# Altium PCB MCED_pcb_1.PcbDoc
Units mm, origin at the board's own origin, x right, y up, seen from the top; angles counter-clockwise.
Board outline 44 x 49 mm, 2 copper layers (L1, L2), stack 1.671 mm thick; 33 components, 23 nets, 111 pads, 5 vias.
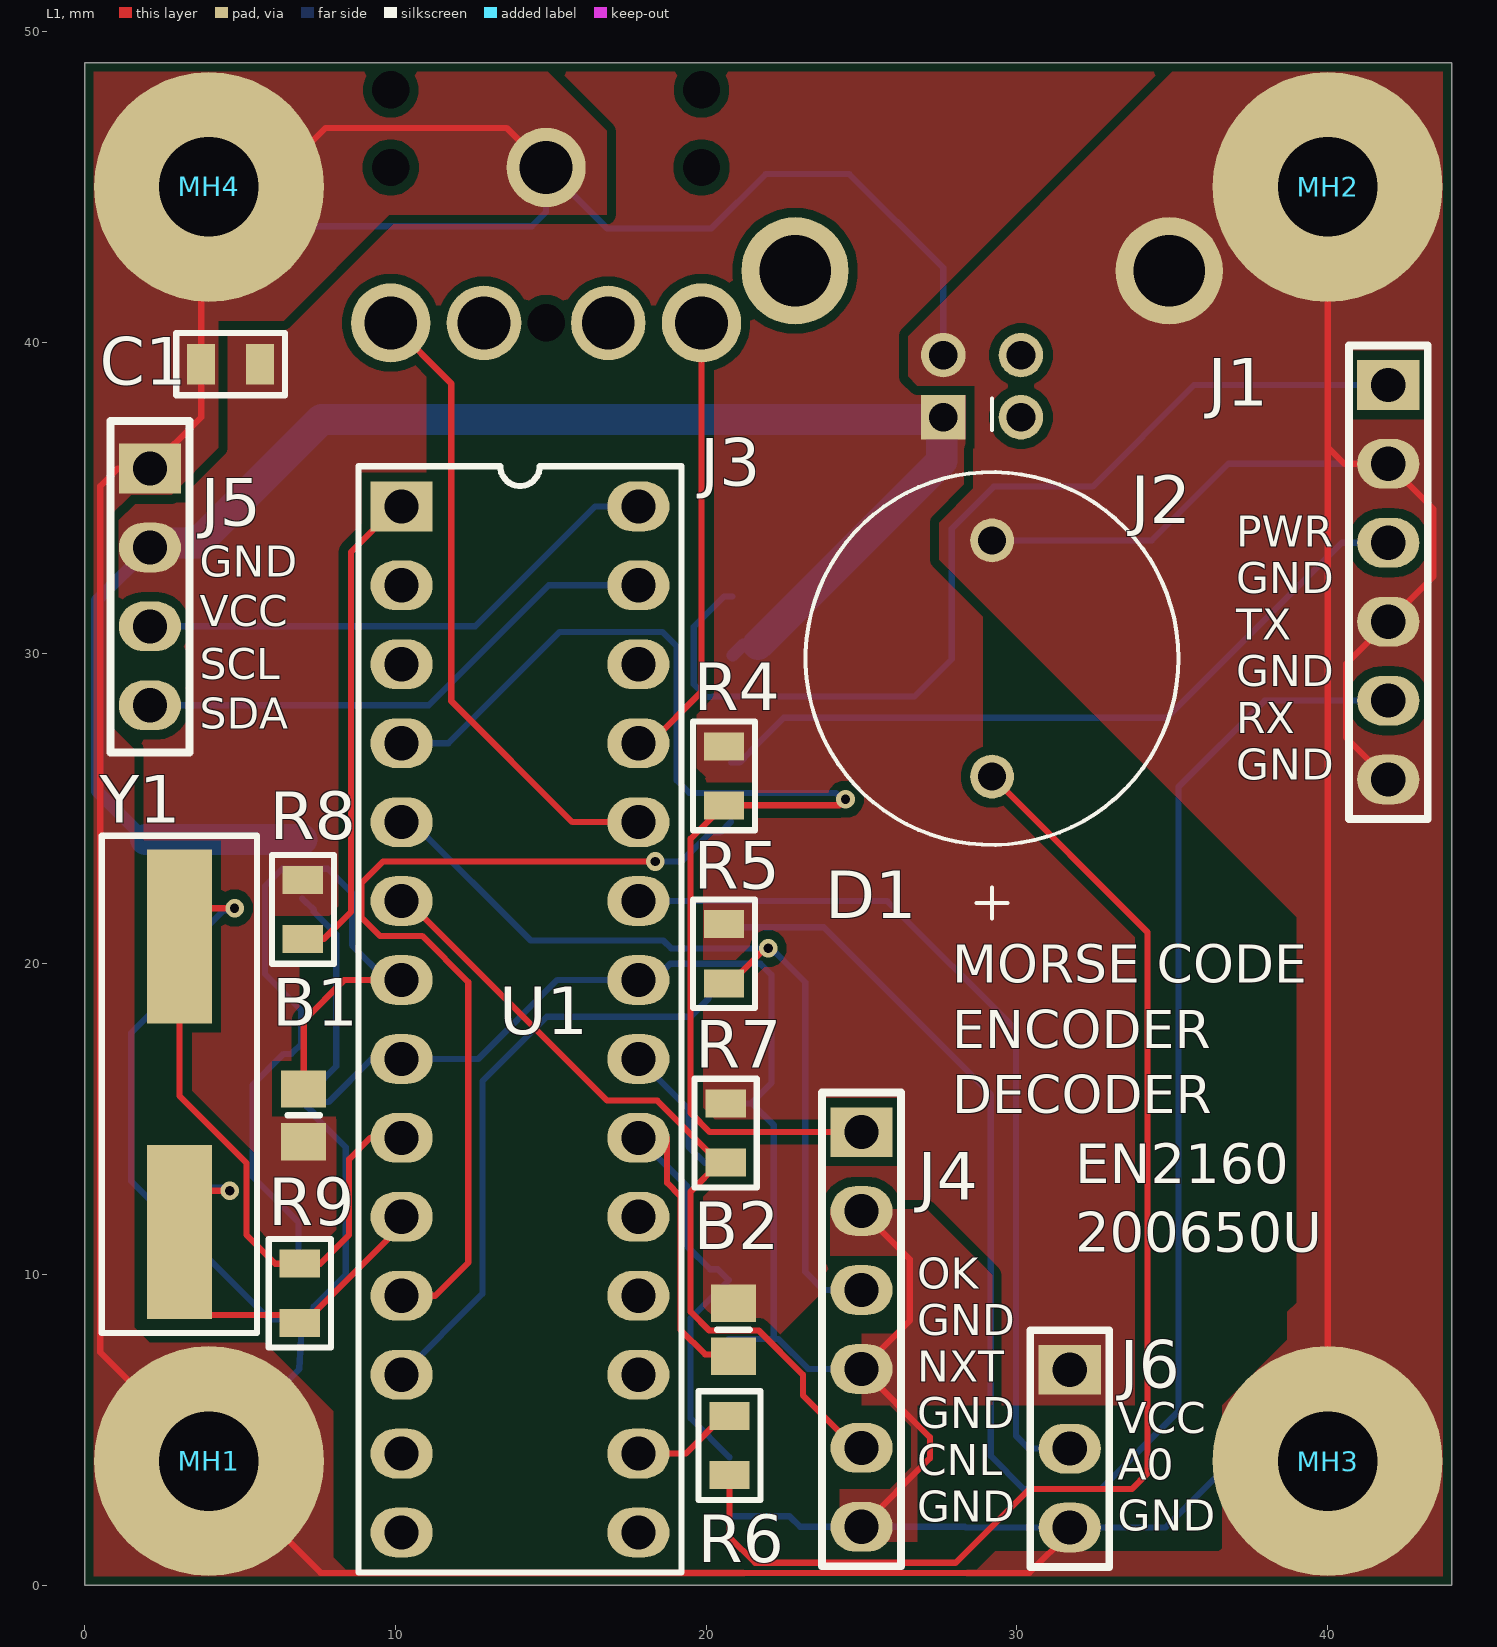
[diagram p0: L1 view]
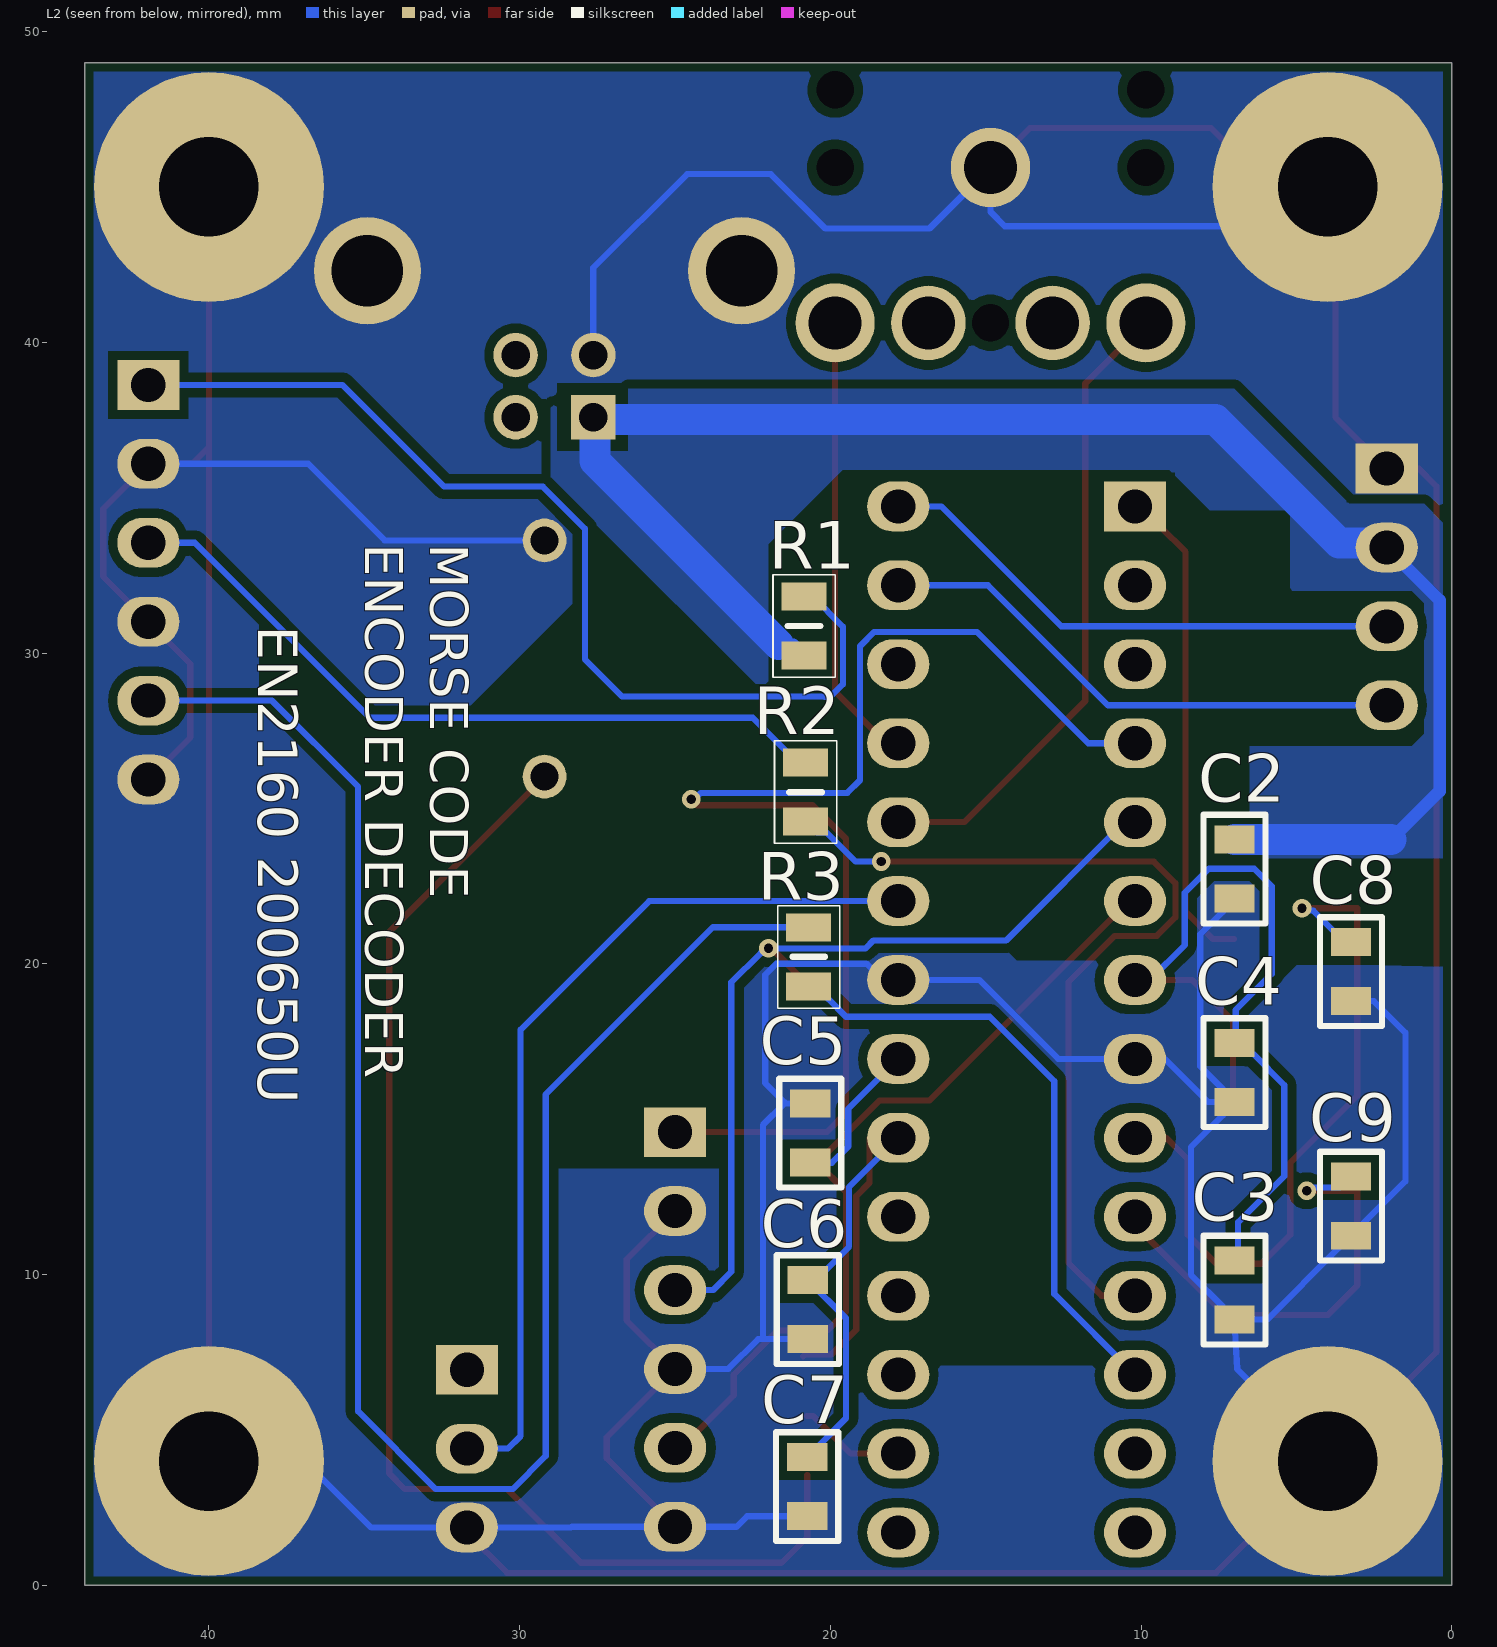
[diagram p1: L2 view, seen from below]
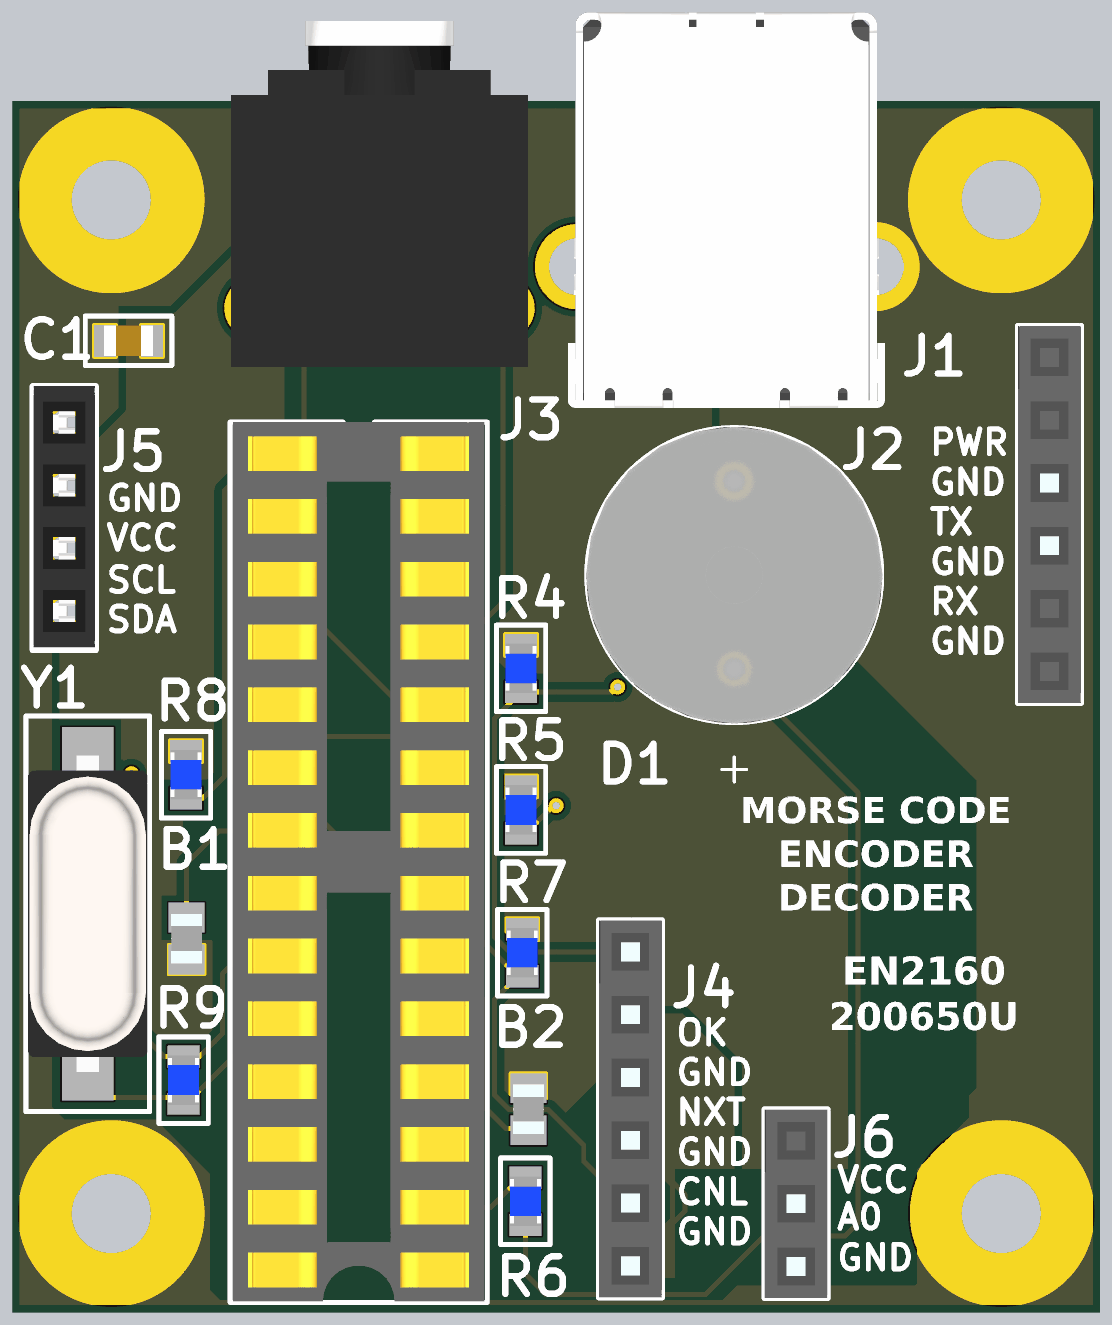
[diagram p2: 3D render of the assembled board from above, using the file's embedded part models]
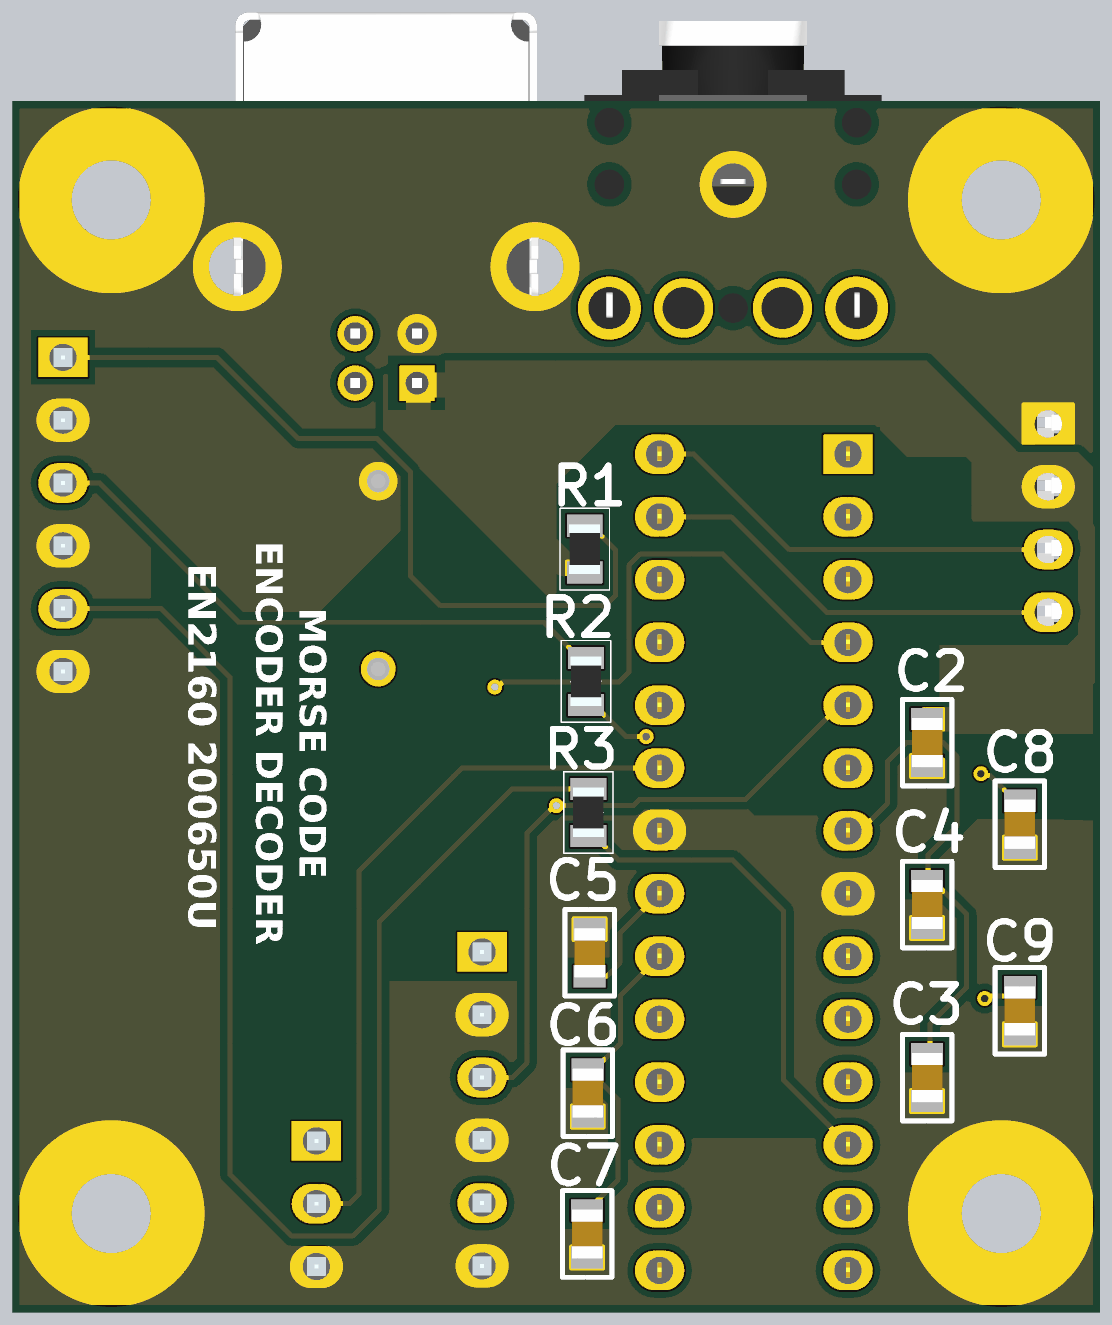
[diagram p3: 3D render of the assembled board from below, using the file's embedded part models]

## Layer stack, top to bottom
Top Solder: solder mask 0.0102, Solder Resist, Dk 3.5
L1: signal copper 0.0356
Dielectric 1: dielectric 1.6, FR-4, Dk 4.8
L2: signal copper 0.0356
Bottom Solder: solder mask 0.0102, Solder Resist, Dk 3.5

## Board outline
0,0 44,0 44,49 0,49

## Design rules (kind name [scope] priority, off if disabled: settings)
BoardOutlineClearance [All] p1: gap=0.2 ignorepadtopadclearanceinfootprint=FALSE
Clearance "Around Polygons" [IsRegion] p1: gap=0.3 ignorepadtopadclearanceinfootprint=FALSE
Clearance [All] p2: gap=0.127 ignorepadtopadclearanceinfootprint=FALSE except(0.25: Arc-Hole Track-Hole SMDPad-Hole THPad-Hole Via-Hole Fill-Hole Poly-Hole Region-Hole Text-Hole)
ComponentClearance [All] p1: gap=0.127 collisioncheckmode=3 verticalgap=0.127 showdistances=TRUE
DiffPairsRouting [All] p1: maxlimit=0.254 minlimit=0.127 mostfreqgap=0.127 toplayer_minwidth=0.127 toplayer_maxwidth=25.4 toplayer_prefwidth=0.127 bottomlayer_minwidth=0.127 bottomlayer_maxwidth=25.4 bottomlayer_prefwidth=0.127 maxuncoupledlength=12.7
Height [All] p1: minheight=0 maxheight=1816.048 prefheight=12.7
HoleSize [All] p1: absolutevalues=TRUE maxlimit=6.3 minlimit=0.3 maxpercent=80.000 minpercent=20.000
HoleToHoleClearance [All] p1: gap=0.25 allowstackedmicrovias=FALSE
MinimumAnnularRing [All] p1: minimumring=0.076
MinimumSolderMaskSliver [All] p1: minsoldermaskwidth=0
PlaneClearance [All] p1: clearance=1
PlaneConnect PlaneConnectPowerPads [InPadClass('PowerPads')] p1: planeconnectstyle=Direct reliefexpansion=0.508 reliefentries=4 reliefconductorwidth=0.254 reliefairgap=0.254
PlaneConnect [All] p2: pad.planeconnectstyle=Relief pad.reliefexpansion=0.3 pad.reliefentries=4 pad.reliefconductorwidth=0.127 pad.reliefairgap=0.127 via.planeconnectstyle=Direct via.reliefexpansion=0.3 via.reliefentries=4 via.reliefconductorwidth=0.127 via.reliefairgap=0.127
PolygonConnect PolygonConnectPowerPads [All vs (InPadClass('PowerPads'))] p1: connectstyle=Direct reliefconductorwidth=0.254 reliefentries=4 polygonreliefangle="90 Angle" airgapwidth=0.254
PolygonConnect [All] p2: connectstyle=Direct reliefconductorwidth=0.127 reliefentries=4 polygonreliefangle="90 Angle" airgapwidth=0.127
RoutingVias [All] p1: holewidth=0.3 width=0.6 viastyle="Through Hole" minholewidth=0.3 minwidth=0.6 maxholewidth=0.6 maxwidth=6.6
SilkToSilkClearance [All] p1: silktosilkclearance=0
SilkToSolderMaskClearance [IsPad] p1: minsilkscreentomaskgap=0.127 clearancetoexposedcopper=TRUE
SolderMaskExpansion [All] p1: expansion=0.075 istentingtop=FALSE
Width [All] p1: maxlimit=25.4 minlimit=0.127 preferedwidth=0.2 minimp=50.000000 maximp=50.000000 favimp=50.000000
20 further rules are at their usual default settings.

## Components (designator, comment, footprint, x,y, rotation, side; value= is the part's Value field where it differs from the comment)
B1 "Ferrite Bead" "FERRITE BEAD C2012X105N" 7.05,15.125 r90 top
B2 "Ferrite Bead" "FERRITE BEAD C2012X105N" 20.875,8.225 r90 top
C1 "10 uF" C0805 4.7,39.3 r0 top
C2 "22pF" C0805 7,23.05 r90 bottom
C3 "10 uF" C0805 7,9.5 r90 bottom
C4 "22pF" C0805 7,16.5 r90 bottom
C5 "100 nF" C0805 20.65,14.55 r270 bottom
C6 "22pF" C0805 20.725,8.875 r90 bottom
C7 "10 uF" C0805 20.75,3.175 r90 bottom
C8 "22pF" C0805 3.25,19.75 r270 bottom
C9 "22pF" C0805 3.25,12.2 r270 bottom
D1 "Buzzer" BUZZER 29.2,29.825 r90 top
J1 "LED - 6 Pin Header" "6 PIN HEADER" 41.95,38.63 r0 top
J2 "USB connector" "USB 2.0 TYPE B 617291011BLF" 27.63,37.59 r180 top
J3 "3.5 mm Audio Jack" "AUDIO JACK SJ13523N" 14.85,50.125 r270 top
J4 "PB - 6 Pin Header" "6 PIN HEADER" 25,14.585 r0 top
J5 "4 Pin Header, 1 Row, Female, 2.54mm Pitch" "4 PIN HEADER" 2.1,35.94 r0 top
J6 "POT - 3 Pin Header" "3 PIN HEADER" 31.7,6.94 r0 top
MH1 "MH" "MOUNTING HOLE" 4,4 r0 top
MH2 "MH" "MOUNTING HOLE" 40,45 r0 top
MH3 "MH" "MOUNTING HOLE" 40,4 r0 top
MH4 "MH" "MOUNTING HOLE" 4,45 r0 top
R1 "330ohm" "300OHM RESC2012X60N" 20.85,30.875 r90 bottom value=330R
R2 "330ohm" "300OHM RESC2012X60N" 20.8,25.525 r90 bottom value=330R
R3 "330ohm" "300OHM RESC2012X60N" 20.7,20.225 r90 bottom value=330R
R4 "10 kOhm" 10K 20.575,26.05 r90 top value=10kR
R5 "10 kOhm" 10K 20.575,20.325 r90 top value=10kR
R6 "10 kOhm" 10K 20.75,4.5 r90 top value=10kR
R7 "10 kOhm" 10K 20.625,14.55 r90 top value=10kR
R8 "10 kOhm" 10K 7.025,21.75 r90 top value=10kR
R9 "10 kOhm" 10K 6.925,9.4 r90 top value=10kR
U1 "TH_IC SOCKET" 28DIP_THROUGH_HOLE_IC_SOCKET 10.2,34.72 r0 top
Y1 "ABLS-16.000MHZ-B4-T" ABLS-16.000MHZ-B4-T_CRYSTAL 3.05,16.125 r90 top

## Footprints (in the part's own frame and the unit in brackets; to place one, negate y for a bottom-side part, rotate by r counter-clockwise, add the part's x,y. Pads: shape width x height; smd on the part's side, far side on the other; paste and mask are expansions set on the pad)
"3 PIN HEADER" [mm]
  rect 2x1.6 hole 1.1: 1(0,0)
  oval 2x1.6 hole 1.1: 2(0,-2.54) 3(0,-5.08)
  silkscreen extent -1.27,-6.35 1.27,1.27, body extent -1.27,-6.35 1.27,1.27, height 8.26
"4 PIN HEADER" [mm]
  rect 2x1.6 hole 1.1: 1(0,0)
  oval 2x1.6 hole 1.1: 2(0,-2.54) 3(0,-5.08) 4(0,-7.62)
  silkscreen extent -1.27,-9.14 1.27,1.52, body extent -1.25,-9.04 1.25,1.52, height 8.51
"6 PIN HEADER" [mm]
  rect 2x1.6 hole 1.1: 1(0,0)
  oval 2x1.6 hole 1.1: 2(0,-2.54) 3(0,-5.08) 4(0,-7.62) 5(0,-10.16) 6(0,-12.7)
  silkscreen extent -1.27,-13.97 1.27,1.27, body extent -1.27,-13.97 1.27,1.27, height 8.26
10K [mm] "Resistor"
  rect 0.9x1.3 smd: 1(-0.95,0) 2(0.95,0)
  silkscreen extent -1.75,-1 1.75,1, body extent -1,-0.63 1,0.63, height 0.45
28DIP_THROUGH_HOLE_IC_SOCKET [mm]
  rect 2x1.6 hole 1.1: 1(0,0)
  oval 2x1.6 hole 1.1: 2(0,-2.54) 3(0,-5.08) 4(0,-7.62) 5(0,-10.16) 6(0,-12.7) 7(0,-15.24) 8(0,-17.78) 9(0,-20.32) 10(0,-22.86) 11(0,-25.4) 12(0,-27.94) 13(0,-30.48) 14(0,-33.02) 15(7.62,-33.02) 16(7.62,-30.48) 17(7.62,-27.94) 18(7.62,-25.4) 19(7.62,-22.86) 20(7.62,-20.32) 21(7.62,-17.78) 22(7.62,-15.24) 23(7.62,-12.7) 24(7.62,-10.16) 25(7.62,-7.62) 26(7.62,-5.08) 27(7.62,-2.54) 28(7.62,0)
  silkscreen extent -1.39,-34.31 9.01,1.29, body extent -1.27,-34.27 8.89,1.29, height 5.15
"300OHM RESC2012X60N" [mm] "330 Ohm"
  rect 0.9x1.45 smd: 1(-0.95,0) 2(0.95,0)
  silkscreen extent -1.65,-1 1.65,1, body extent -1,-0.63 1,0.63, height 0.6
ABLS-16.000MHZ-B4-T_CRYSTAL [mm]
  rect 5.6x2.1 smd: 1(-4.75,0) 2(4.75,0)
  silkscreen extent -8,-2.5 8,2.5, body extent -6.4,-2.41 6.4,2.41, height 4.31
"AUDIO JACK SJ13523N" [mm] "audio jack"
  round 2.55 hole 1.7: 1(4.5,0) 2(9.5,-5) 3(9.5,5)
  round 2.4 hole 1.7: 10(9.5,-2) 11(9.5,2)
  round 0.6 hole 1.2 unplated: MH1(2,5) MH2(4.5,5) MH3(9.5,0) MH4(2,-5) MH5(4.5,-5)
  body extent -10,-3.38 10,3.38, height 5.8
BUZZER [mm] "Buzzer"
  round 1.408 hole 0.9: N(3.8,0) P(-3.8,0)
  silkscreen extent -8.36,-6 8.36,6, body extent -5.99,-6 5.99,6, height 9.51
C0805 [mm]
  rect 0.9x1.3 smd: 1(-0.95,0) 2(0.95,0)
  silkscreen extent -1.75,-1 1.75,1, body extent -1,-0.63 1,0.63, height 1
"FERRITE BEAD C2012X105N" [mm] "FERRITE BEAD"
  rect 1.2x1.45 smd: 1(-0.85,0) 2(0.85,0)
  silkscreen extent 0,-0.53 0,0.52, body extent -10,-3.38 10,3.38, height 5.8
"MOUNTING HOLE" [mm]
  round 7.4 hole 3.2: 1(0,0)
"USB 2.0 TYPE B 617291011BLF" [mm]
  rect 1.431x1.431 hole 0.92: 1(0,0)
  round 1.431 hole 0.92: 2(-2.5,0) 3(-2.5,-2) 4(0,-2)
  round 3.45 hole 2.3: MH1(4.77,-4.71) MH2(-7.27,-4.71)
  body extent -7.66,-15 5.16,1, height 11.11

## Part data
B1 B2: library part MPZ2012S601AT000, "Ferrite Bead, 1 Function(s), 2A", Case Code=0805, Clock Frequency=100MHz, Current Rating=2A, DC Resistance-Max=100mR, Manufacturer=TDK, Max Operating Temperature=125°C, Min Operating Temperature=-55°C, Supplier Part Number=810-MPZ2012S601AT000, Category="Ferrite Beads and Chips", Channels=1, ComponentLink1Description=https://datasheet.ciiva.com:443/pdfs/VipMasterIC/IC/TDKC/TDKC-S-A0008032886/TDKC-S-A0008032886-1.pdf?src-supplier=IHS+Markit, ComponentLink1URL=https://datasheet.ciiva.com:443/pdfs/VipMasterIC/IC/TDKC/TDKC-S-A0008032886/TDKC-S-A0008032886-1.pdf?src-supplier=IHS+Markit, ComponentLink2Description=https://datasheet.ciiva.com/46634/beads-commercial-power-mpz-en-46634335.pdf?src-supplier=Digi-Key, ComponentLink2URL=https://datasheet.ciiva.com/46634/beads-commercial-power-mpz-en-46634335.pdf?src-supplier=Digi-Key, ComponentLink3Description=https://datasheet.ciiva.com/46634/beads-commercial-power-mpz-en-46634377.pdf?src-supplier=Digi-Key, ComponentLink3URL=https://datasheet.ciiva.com/46634/beads-commercial-power-mpz-en-46634377.pdf?src-supplier=Digi-Key, ComponentLink4Description=https://datasheet.ciiva.com/46634/beads-commercial-power-mpz-en-46634606.pdf?src-supplier=Digi-Key, ComponentLink4URL=https://datasheet.ciiva.com/46634/beads-commercial-power-mpz-en-46634606.pdf?src-supplier=Digi-Key, Construction="Chip Bead", Filter Type="FERRITE CHIP", Height=0.85mm, JESD-609 Code=e2, Length=2mm, Manufacturer Part Number=MPZ2012S601AT000, Material=Ferrite, Min Frequency=100MHz, Mounting Technology="Surface Mount", Output Impedance=600R, Packaging="Tape and Reel", Pricing="1=0.12, 10=0.061, 50=0.061, 100=0.042, 1000=0.035, 10000=0.027 (USD)", Reach SVHC Compliant=Yes, RoHS=Yes, RoHS Compliant=Yes, Stock=782263, Supplier=Mouser, Terminal Finish=Copper, Width=1.25mm
C1 C3 C5 C7: library part CL21A106KBYQNNE, "10 uF Ceramic Capacitor, Multilayer, Ceramic, 50V, 10% +Tol, 10% -Tol, X5R, 15% TC, 10uF, Surface Mount, 0805", Capacitor Type=Ceramic, Manufacturer=Samsung, Supplier Part Number=187-CL21A106KBYQNNE, Category="Ceramic Capacitors", ComponentLink1Description=https://datasheet.ciiva.com:443/pdfs/VipMasterIC/IC/SEMS/SEMS-S-A0008524728/SEMS-S-A0008519922-1.pdf?src-supplier=IHS+Markit, ComponentLink1URL=https://datasheet.ciiva.com:443/pdfs/VipMasterIC/IC/SEMS/SEMS-S-A0008524728/SEMS-S-A0008519922-1.pdf?src-supplier=IHS+Markit, Dielectric Material=Ceramic, Manufacturer Part Number=CL21A106KBYQNNE, Pins=2, Pricing="1=0.42, 10=0.299, 50=0.299, 100=0.197, 1000=0.124, 10000=0.1 (USD)", Reach SVHC Compliant=Yes, RoHS=Yes, RoHS Compliant=Yes, Stock=29602, Supplier=Mouser
C2 C4 C6 C8 C9: library part VJ0805A220GXACW1BC, "22pF Ceramic Capacitor, Multilayer, Ceramic, 50V, 2% +Tol, 2% -Tol, C0G, -/+30ppm/Cel TC, 0.000022uF, Surface Mount, 0805", Capacitor Type=Ceramic, Case/Package=0805, Manufacturer="Vishay Vitramon", Manufacturer Series=VJ, Max Operating Temperature=125°C, Min Operating Temperature=-55°C, Package Shape=Rectangular, Rated DC Voltage (URdc)=50V, Supplier Part Number=C2174318, Temperature Characteristics Code=C0G, Tolerance  (fill in as +-)=2%, Category="Ceramic Capacitors", ComponentLink1Description=https://datasheet.ciiva.com:443/pdfs/VipMasterIC/IC/BEYS/BEYSS01615/BEYSS01615-1.pdf?src-supplier=IHS+Markit, ComponentLink1URL=https://datasheet.ciiva.com:443/pdfs/VipMasterIC/IC/BEYS/BEYSS01615/BEYSS01615-1.pdf?src-supplier=IHS+Markit, ComponentLink2Description=https://datasheet.ciiva.com/16511/vjw1bcbascomseries-16511287.pdf?src-supplier=Future+Electronics, ComponentLink2URL=https://datasheet.ciiva.com/16511/vjw1bcbascomseries-16511287.pdf?src-supplier=Future+Electronics, Dielectric Material=Ceramic, JESD-609 Code=e3, Manufacturer Part Number=VJ0805A220GXACW1BC, Mounting Technology="Surface Mount", Multilayer=Yes, Packaging="Tape and Reel", Pins=2, Pricing="5=0.0755, 50=0.0623, 150=0.0557, 500=0.0508, 2500=0.042, 4000=0.04 (USD)", Reach SVHC Compliant=Yes, RoHS=Yes, RoHS Compliant=Yes, Stock=3750, Supplier=LCSC, Terminal Finish=Tin, Termination=Wraparound, Tolerance (fill in as +-)=2%
D1: library part KXG1201C, "Buzzer - Magnetic Indicator Active Buzzer [Kingstate], Pine Type, Dimensions(mm): 12.00*9.50, Voltage:1.2~3.0, Max current consumption(mA): Max. 30, SPL(dB): Min. 80dB(Typical 85)@10cm, Frequency(KHz): 2.30.", Package=None, Availability="In Stock", Check_prices=https://www.snapeda.com/parts/KXG1201C/Kingstate/view-part/?ref=eda, MF=Kingstate, MP=KXG1201C, Price=None, SnapEDA_Link=https://www.snapeda.com/parts/KXG1201C/Kingstate/view-part/?ref=snap
J1 J4: library part 929850-01-06-RB, "6 Pin Header Board Connector", Manufacturer=3M, Manufacturer Series=929, Supplier Part Number=517-929850-01-06-RB, Category="Headers and Wire Housings", ComponentLink1Description=https://datasheet.ciiva.com:443/pdfs/VipMasterIC/IC/IIIM/IIIMS03618/IIIMS03618-1.pdf?src-supplier=IHS+Markit, ComponentLink1URL=https://datasheet.ciiva.com:443/pdfs/VipMasterIC/IC/IIIM/IIIMS03618/IIIMS03618-1.pdf?src-supplier=IHS+Markit, ComponentLink2Description=https://datasheet.ciiva.com/5148/ts0815-5148223.pdf?src-supplier=Mouser, ComponentLink2URL=https://datasheet.ciiva.com/5148/ts0815-5148223.pdf?src-supplier=Mouser, ComponentLink3Description=https://datasheet.ciiva.com/756/ts0815-756418.pdf?src-supplier=Digi-Key, ComponentLink3URL=https://datasheet.ciiva.com/756/ts0815-756418.pdf?src-supplier=Digi-Key, Connector Type="BOARD CONNECTOR", Manufacturer Part Number=929850-01-06-RB, Pricing="1=2.56, 10=2.08, 50=2.08, 100=1.99, 1000=1.42, 10000=1.26 (USD)", Reach SVHC Compliant=Yes, RoHS=Yes, RoHS Compliant=Yes, Stock=258, Supplier=Mouser
J2: library part 61729-1011BLF, "USB 2.0 connector, Type B, Receptacle, Through Hole, 30u GXT Contact, 4 Pins, 1.57mm PCB", Manufacturer="Amphenol ICC / FCI", Category=Connectors, ComponentLink1Description=https://datasheet.ciiva.com/8015/697864-8015261.pdf?src-supplier=Element14, ComponentLink1URL=https://datasheet.ciiva.com/8015/697864-8015261.pdf?src-supplier=Element14, Manufacturer Part Number=61729-1011BLF, RoHS=No, Supplier=Avnet, Supplier Part Number=61729-1011BLF
J3: library part SJ1-3523N, "3.5 mm Audio Jack, Female, 3 Pole(s), Solder Terminal, Jack", Manufacturer="CUI Devices", Supplier Part Number=490-SJ1-3523N, Category="Audio / Video Connectors", Manufacturer Part Number=SJ1-3523N, Pricing="1=1.08, 10=0.913, 50=0.913, 100=0.819, 1000=0.596, 10000=0.495 (USD)", Reach SVHC Compliant=Yes, RoHS=Yes, Stock=9497, Supplier=Mouser
J5: library part M20-7820446, "4 Pin Header Board Connector, 4 Contact(s), 1 Row(s), Female, Straight, 0.1 inch Pitch, Solder Terminal, Locking, Black Insulator, Socket", Contact Resistance=20mR, Dielectric Withstanding Voltage (AC)=1kV, Flammability Rating="UL94 V-0", Insulation Color=Black, Insulation Resistance=1GR, Manufacturer=Harwin, Max Operating Temperature=105°C, Min Operating Temperature=-40°C, Rated Current (Signal)=3A, Supplier Part Number=952-1792-ND, Body Breadth=0.098inch, Body Depth=0.335inch, Body Length=0.4inch, Body/Shell Style=SOCKET, Category="Headers and Wire Housings", ComponentLink1Description=https://datasheet.ciiva.com:443/pdfs/VipMasterIC/IC/HRWN/HRWN-S-A0004894635/HRWN-S-A0004894635-1.pdf?src-supplier=IHS+Markit, ComponentLink1URL=https://datasheet.ciiva.com:443/pdfs/VipMasterIC/IC/HRWN/HRWN-S-A0004894635/HRWN-S-A0004894635-1.pdf?src-supplier=IHS+Markit, ComponentLink2Description=https://datasheet.ciiva.com/11747/0900766b80dc1d2b-11747084.pdf?src-supplier=Rs, ComponentLink2URL=https://datasheet.ciiva.com/11747/0900766b80dc1d2b-11747084.pdf?src-supplier=Rs, ComponentLink3Description=https://datasheet.ciiva.com/6784/m20-782-6784360.pdf?src-supplier=Digi-Key, ComponentLink3URL=https://datasheet.ciiva.com/6784/m20-782-6784360.pdf?src-supplier=Digi-Key, ComponentLink4Description=https://datasheet.ciiva.com/7639/1836950-7639727.pdf?src-supplier=Element14, ComponentLink4URL=https://datasheet.ciiva.com/7639/1836950-7639727.pdf?src-supplier=Element14, ComponentLink5Description=https://datasheet.ciiva.com/10151/m20-782-10151359.pdf?src-supplier=Avnet, ComponentLink5URL=https://datasheet.ciiva.com/10151/m20-782-10151359.pdf?src-supplier=Avnet, Connector Type="BOARD CONNECTOR", Contact Finish - Mating=TIN, Contact Finish - Termination=TIN, Contact Gender=Female, Contact Pattern=RECTANGULAR, Contact Style="SQ PIN-SKT", DIN Conformance=No, Durability=300Cycles, Filter Feature=No, IEC Conformance=No, Insulation Material=Polyamide, JESD-609 Code=e3, Manufacturer Part Number=M20-7820446, Mating Contact Pitch=0.1inch, MIL Conformance=No, Mixed Contacts=No, Mounting Option 1=LOCKING, Mounting Style=STRAIGHT, Mounting Technology=Board, Number Of Connectors=1, Number of Contacts=4, Number Of PCB Rows=1, Number of Rows Loaded=1, Option="General Purpose", PCB Contact Pattern=RECTANGULAR, Polarization Key="POLARIZED HOUSING", Pricing="1=1.02, 10=0.859, 100=0.771, 500=0.63084, 1000=0.56075, 5000=0.49066, 10000=0.46613 (USD)", Reach SVHC Compliant=Yes, Reference Standard=UL, Reliability=COMMERCIAL, RoHS=Yes, RoHS Compliant=Yes, Stock=3461, Supplier=Digi-Key, Terminal Length=0.118inch, Terminal Pitch=2.54mm, Termination=Solder
J6: library part 929850-01-03-RA, "3 Pin Header Board Connector, 3 Contact(s), 1 Row(s), Female, Straight, Solder Terminal, Socket", Flammability Rating="UL94 V-0", Manufacturer=3M, Manufacturer Series=929, Supplier Part Number=19-929850-01-03-RA-ND, Additional Feature=3M, Body/Shell Style=SOCKET, Category="Headers and Wire Housings", ComponentLink1Description=https://datasheet.ciiva.com:443/pdfs/VipMasterIC/IC/IIIM/IIIMS03618/IIIMS03618-1.pdf?src-supplier=IHS+Markit, ComponentLink1URL=https://datasheet.ciiva.com:443/pdfs/VipMasterIC/IC/IIIM/IIIMS03618/IIIMS03618-1.pdf?src-supplier=IHS+Markit, ComponentLink2Description=https://datasheet.ciiva.com/746/ts0815-746343.pdf?src-supplier=Digi-Key, ComponentLink2URL=https://datasheet.ciiva.com/746/ts0815-746343.pdf?src-supplier=Digi-Key, ComponentLink3Description=https://datasheet.ciiva.com/5167/ts0815-5167287.pdf?src-supplier=Mouser, ComponentLink3URL=https://datasheet.ciiva.com/5167/ts0815-5167287.pdf?src-supplier=Mouser, Connector Type="BOARD CONNECTOR", Contact Finish - Mating="GOLD (10) OVER NICKEL (100)", Contact Finish - Termination="MATTE TIN OVER NICKEL (100)", Contact Gender=Female, Contact Material="Copper Alloy", DIN Conformance=No, Filter Feature=No, IEC Conformance=No, JESD-609 Code=e3, Manufacturer Part Number=929850-01-03-RA, MIL Conformance=No, Mixed Contacts=No, Mounting Style=STRAIGHT, Mounting Technology=Board, Number of Contacts=3, Number of Rows Loaded=1, Option="General Purpose", Pricing="1=1.97, 10=1.719, 100=1.536, 500=1.28002, 1000=1.09716, 5000=0.97282, 10000=0.95088 (USD)", Reach SVHC Compliant=Yes, RoHS=Yes, RoHS Compliant=Yes, Stock=1296, Supplier=Digi-Key, Terminal Pitch=2.54mm, Termination=Solder
MH1 MH2 MH3 MH4: library part "Mounting Hole"
R1 R2 R3: library part CRCW0805330RFKEA, "330ohm, Fixed Resistor, Metal Glaze/thick Film, 0.125W, 150V, 1% +/-Tol, 100ppm/Cel, Surface Mount, 0805", Case/Package=0805, Manufacturer=Vishay, Max Operating Temperature=155°C, Min Operating Temperature=-55°C, Package Height=0.45mm, Package Length=2mm, Package Shape=Rectangular, Package Style=SMTMeter, Package Width=1.25mm, Power=125mW, Rated Temperature=70°C, Resistor Type="FIXED RESISTOR", Supplier Part Number=71-CRCW0805-330-E3, Temperature Coefficient=100ppm/°C, Tolerance=1%, Working Voltage=150V, Category="Chip SMD Resistors", ComponentLink1Description=https://datasheet.ciiva.com:443/pdfs/VipMasterIC/IC/VISH/VISH-S-A0007266705/VISH-S-A0007266705-1.pdf?src-supplier=IHS+Markit, ComponentLink1URL=https://datasheet.ciiva.com:443/pdfs/VipMasterIC/IC/VISH/VISH-S-A0007266705/VISH-S-A0007266705-1.pdf?src-supplier=IHS+Markit, ComponentLink2Description=https://datasheet.ciiva.com/7777/1720486-7777573.pdf?src-supplier=Element14, ComponentLink2URL=https://datasheet.ciiva.com/7777/1720486-7777573.pdf?src-supplier=Element14, ComponentLink3Description=https://datasheet.ciiva.com/8944/dcrcwe3-8944773.pdf?src-supplier=Avnet, ComponentLink3URL=https://datasheet.ciiva.com/8944/dcrcwe3-8944773.pdf?src-supplier=Avnet, ComponentLink4Description=https://datasheet.ciiva.com/8944/dcrcwe3-8944776.pdf?src-supplier=Avnet, ComponentLink4URL=https://datasheet.ciiva.com/8944/dcrcwe3-8944776.pdf?src-supplier=Avnet, ComponentLink5Description=https://datasheet.ciiva.com/2495/dcrcwe3-2495804.pdf?src-supplier=Digi-Key, ComponentLink5URL=https://datasheet.ciiva.com/2495/dcrcwe3-2495804.pdf?src-supplier=Digi-Key, ComponentLink6Description=https://datasheet.ciiva.com/5545/dcrcwe3-109170-5545357.pdf?src-supplier=Mouser, ComponentLink6URL=https://datasheet.ciiva.com/5545/dcrcwe3-109170-5545357.pdf?src-supplier=Mouser, ComponentLink7Description=https://datasheet.ciiva.com/7777/1697337-7777390.pdf?src-supplier=Element14, ComponentLink7URL=https://datasheet.ciiva.com/7777/1697337-7777390.pdf?src-supplier=Element14, ComponentLink8Description=https://datasheet.ciiva.com/2495/dcrcwe3-2495805.pdf?src-supplier=Digi-Key, ComponentLink8URL=https://datasheet.ciiva.com/2495/dcrcwe3-2495805.pdf?src-supplier=Digi-Key, ComponentLink9Description=https://datasheet.ciiva.com/2495/dcrcwe3-2495803.pdf?src-supplier=Digi-Key, ComponentLink9URL=https://datasheet.ciiva.com/2495/dcrcwe3-2495803.pdf?src-supplier=Digi-Key, ComponentLink10Description=https://datasheet.ciiva.com/16769/70201119-16769852.pdf?src-supplier=Allied+Electronics, ComponentLink10URL=https://datasheet.ciiva.com/16769/70201119-16769852.pdf?src-supplier=Allied+Electronics, Construction=Chip, JESD-609 Code=e3, Manufacturer Part Number=CRCW0805330RFKEA, Mounting Technology="Surface Mount", Packaging="Tape and Reel", Pins=2, Pricing="1=0.13, 10=0.068, 50=0.068, 100=0.028, 1000=0.013, 10000=0.008 (USD)", Reach SVHC Compliant=Yes, Reference Standard=AEC-Q200, RoHS=Yes, RoHS Compliant=Yes, Stock=46, Supplier=Mouser, Technology="METAL GLAZE/THICK FILM", Terminal Finish=Nickel, Termination=Wraparound
R4 R5 R6 R7 R8 R9: library part MCU0805MD1002DP500, "10 kOhm, Fixed Resistor, Thin Film, 0.2W, 10000ohm, 150V, 0.5% +/-Tol, -25,25ppm/Cel, 0805", Case/Package=0805, Manufacturer="Vishay Beyschlag", Max Operating Temperature=175°C, Min Operating Temperature=-55°C, Package Height=0.52mm, Package Length=2mm, Package Style=SMTMeter, Package Width=1.25mm, Power=200mW, Resistor Type="FIXED RESISTOR", Supplier Part Number=594-MCU0805MD1002DP5, Temperature Coefficient=-2525ppm/°C, Tolerance=0.5%, Working Voltage=150V, Category="Chip SMD Resistors", ComponentLink1Description=https://datasheet.ciiva.com:443/pdfs/VipMasterIC/IC/VISH/VISH-S-A0002932058/VISH-S-A0002932058-1.pdf?src-supplier=IHS+Markit, ComponentLink1URL=https://datasheet.ciiva.com:443/pdfs/VipMasterIC/IC/VISH/VISH-S-A0002932058/VISH-S-A0002932058-1.pdf?src-supplier=IHS+Markit, ComponentLink2Description=https://datasheet.ciiva.com/12696/mcat-pro-223602-12696124.pdf?src-supplier=Mouser, ComponentLink2URL=https://datasheet.ciiva.com/12696/mcat-pro-223602-12696124.pdf?src-supplier=Mouser, Construction=Chip, JESD-609 Code=e3, Manufacturer Part Number=MCU0805MD1002DP500, Packaging="Tape and Reel", Pins=2, Pricing="1=0.39, 10=0.3, 50=0.3, 100=0.127, 1000=0.07, 10000=0.06 (USD)", Reach SVHC Compliant=Yes, Reference Standard=AEC-Q200, RoHS=Yes, RoHS Compliant=Yes, Series="MCU 0805 AT-PROF", Stock=49020, Supplier=Mouser, Technology="THIN FILM", Terminal Finish=Nickel
U1: library part ICS-328-T, "Through Hole IC Sockets 28P / .300\"", Manufacturer="Adam Equipment", Category="IC and Component Sockets", ComponentLink1Description=https://datasheet.ciiva.com/16210/page-187-188-16210500.pdf?src-supplier=Future+Electronics, ComponentLink1URL=https://datasheet.ciiva.com/16210/page-187-188-16210500.pdf?src-supplier=Future+Electronics, Manufacturer Part Number=ICS-328-T, Pricing="1=0.1941, 17=0.1922, 34=0.1565, 51=0.1549, 85=0.1534, 238=0.139, 442=0.1333, 952=0.1182 (USD)", RoHS=Yes, Stock=603, Supplier="Arrow Electronics", Supplier Part Number=ICS-328-T
Y1: "16MHz ±30ppm 晶体 18pF 40 欧姆 -20°C ~ 70°C  表面贴装 HC49/US", Manufacturer=Abracon, Supplier Part Number=C596821, Category=Crystals, ComponentLink1Description=https://datasheet.ciiva.com/15116/getdatasheetpartid-719935-15116811.pdf?src-supplier=Verical, ComponentLink1URL=https://datasheet.ciiva.com/15116/getdatasheetpartid-719935-15116811.pdf?src-supplier=Verical, ComponentLink2Description=https://datasheet.ciiva.com/854/abls-854145.pdf?src-supplier=Digi-Key, ComponentLink2URL=https://datasheet.ciiva.com/854/abls-854145.pdf?src-supplier=Digi-Key, ComponentLink3Description=https://datasheet.ciiva.com/854/abls-854144.pdf?src-supplier=Digi-Key, ComponentLink3URL=https://datasheet.ciiva.com/854/abls-854144.pdf?src-supplier=Digi-Key, ComponentLink4Description=https://datasheet.ciiva.com/854/abls-854146.pdf?src-supplier=Digi-Key, ComponentLink4URL=https://datasheet.ciiva.com/854/abls-854146.pdf?src-supplier=Digi-Key, ComponentLink5Description=https://datasheet.ciiva.com/3175/abls-3175359.pdf?src-supplier=Avnet, ComponentLink5URL=https://datasheet.ciiva.com/3175/abls-3175359.pdf?src-supplier=Avnet, ComponentLink6Description=https://datasheet.ciiva.com/16423/abls-16423759.pdf?src-supplier=Future+Electronics, ComponentLink6URL=https://datasheet.ciiva.com/16423/abls-16423759.pdf?src-supplier=Future+Electronics, Manufacturer Part Number=ABLS-16.000MHZ-B4-T, Pricing="1=0.2737, 10=0.1984, 30=0.1552, 100=0.136, 500=0.1275, 1000=0.1224 (USD)", RoHS=Yes, Stock=196, Supplier=LCSC

## Via types
v1: diameter 0.6, hole 0.3, L1 to L2, 5 vias

## Nets (pads, with @x,y where several pads share a name; then routed paths per layer and width w, separated by ;. In a path a pad name is that pad's centre, name@x,y a point inside that pad or via, vN(x,y) a via of type N, cw(c..) or ccw(c..) an arc to the next point about the centre after c; other vN are vias at no path point)
+5V: B1.1 B2.2 C1.2 C2.2 J2.1 J5.2 J6.1 R1.1 R4.2 R5.2 R7.2 R8.2 | length 53.8
  L2 w0.4: 1.957,24 0.4,25.557 0.4,31.7 J5.2 J5.2@2.24,33.54 ; R1.1 21.2,30.275 21.675,30.275
  L2 w1: 1.957,24 C2.2 ; J5.2@2.24,33.54 3.64,33.54 7.615,37.515 27.555,37.515 J2.1 27.582,37.542 27.582,36.182 21.675,30.275
A1: J3.2 U1.24 | length 20.6
  L1 w0.2: J3.2 11.8,38.675 11.8,28.457 15.697,24.56 U1.24
A2: J3.3 U1.25 | length 14.6
  L1 w0.2: U1.25 18.2,27.1 19.85,28.75 J3.3
D2: J4.1 R4.1 U1.4 | length 40.6
  L1 w0.2: v1(24.485,25.298) 24.287,25.1 20.599,25.1 R4.1 19.5,24.025 19.5,15.2 20.115,14.585 J4.1
  L2 w0.2: U1.4 11.708,27.1 15.29,30.682 18.592,30.682 19.049,30.225 19.049,25.907 19.456,25.5 24.174,25.5 24.377,25.298 v1(24.485,25.298)
D3: J4.3 R5.1 U1.5 | length 28.3
  L1 w0.2: R5.1 20.775,19.375 21.897,20.497 v1(21.996,20.497)
  L2 w0.2: U1.5 10.54,24.56 14.349,20.751 18.617,20.751 18.871,20.497 v1(21.996,20.497) ; v1@21.996,20.345 22.25,20.345 23.189,19.405 23.189,10.089 23.774,9.505 J4.3
D4: J4.5 R7.1 U1.6 | length 26.8
  L1 w0.2: U1.6 10.4,22.02 16.82,15.6 18.425,15.6 R7.1@20.425,13.6 ; R7.1 R7.1@20.425,13.6 ; J4.5 24.8,4.425 23.113,6.112 23.113,6.783 21.694,8.202 20.102,8.202 19.5,8.804 19.5,12.675 R7.1@20.425,13.6
D5: R2.1 U1.11 | length 29.7
  L1 w0.2: U1.11 11.277,9.32 12.344,10.387 12.344,19.414 10.858,20.9 9.502,20.9 8.9,21.502 8.9,22.591 9.6,23.291 v1(18.363,23.291)
  L2 w0.2: v1(18.363,23.291) 19.191,23.291 20.125,24.225 20.45,24.225 R2.1
D6: R3.1 U1.12 | length 19.7
  L2 w0.2: U1.12 12.8,9.38 12.8,16.229 14.871,18.3 19.5,18.3 20.075,18.875 20.075,18.925 20.425,19.275 R3.1
D10: R6.2 U1.16 | length 3.4
  L1 w0.2: U1.16 19.34,4.24 20.55,5.45 R6.2
GND: C1.1 C2.1 C3.1 C4.1 C5.1 C6.1 C7.1 C8.2 C9.2 D1.N J1.2 J1.4 J1.6 J2.4 J2.MH1 J2.MH2 J3.1 J4.2 J4.4 J4.6 J5.1 J6.3 MH1.1 MH2.1 MH3.1 MH4.1 U1.8 U1.22 | length 291.4
  L1 w0.2: J3.1 13.575,46.9 7.757,46.9 5.857,45 MH4.1 4,42.261 3.75,42.011 C1.1 3.75,37.59 J5.1 1.066,35.94 0.5,35.374 0.5,7.5 MH1.1 7.6,0.4 30.4,0.4 31.7,1.7 J6.3 ; J4.6 27.2,4.085 27.2,4.765 J4.4 26.554,8.519 26.554,10.491 J4.2 ; MH3.1 40,36.628 ; MH2.1 40,36.628 ; J1.6 40.6,27.28 40.6,29.66 J1.4 43.4,32.46 43.4,34.64 J1.2 40.538,36.09 40,36.628
  L2 w0.2: C8.2@3.248,18.802 2.519,18.802 1.5,17.783 1.5,13.004 2.852,11.651 2.852,11.6 C9.2@3.252,11.252 ; C9.2@3.254,11.25 3.645,10.9 3.645,10.858 5.952,8.552 6.75,8.552 C3.1@6.998,8.552 ; MH1.1 4,4.053 6.907,6.96 6.979,8.194 6.979,8.2 C3.1 7.369,8.9 7.369,8.972 8.4,10.003 8.4,14.101 7.371,15.13 7.371,15.2 C4.1 7.37,15.9 7.37,15.972 8.1,16.703 8.1,20.951 7.372,21.679 7.372,21.75 C2.1 ; MH4.1 5.262,43.738 14.393,43.738 14.85,44.195 J3.1 16.813,43.662 20.162,43.662 21.914,45.414 24.612,45.414 27.63,42.396 J2.4 ; C4.1@7.002,15.552 7.848,15.552 9.238,16.942 U1.8@10.198,16.942 ; U1.8@10.202,16.942 12.674,16.942 15.214,19.482 18.319,19.482 18.837,20 21.747,20 22.1,19.647 22.1,16.163 21.488,15.551 ; C5.1@20.652,15.502 21.488,15.502 22.175,14.814 22.175,7.925 ; C6.1 22.175,7.925 ; C7.1 22.681,2.225 23.021,1.885 J4.6 28.32,1.885 28.345,1.86 J6.3 34.772,1.86 36.912,4 MH3.1 ; J4.4@24.998,6.967 23.286,6.967 22.328,7.925 22.175,7.925 ; D1.N 34.34,33.625 36.805,36.09 J1.2
NetB1_2: B1.2 C3.2 C4.2 U1.7 | length 27.1
  L1 w0.2: B1.2 7.05,18.174 8.356,19.48 U1.7
  L2 w0.2: C4.2@6.959,17.45 6.959,18.516 5.8,19.675 5.8,22.5 6.362,23.062 7.822,23.062 8.6,22.285 8.6,20.604 9.724,19.48 U1.7 ; C3.2 6.883,10.45 6.883,11.683 5.4,13.166 5.4,16.1 6.4,17.1 6.65,17.1 C4.2
NetB2_1: B2.1 C6.2 C7.2 U1.20 | length 22
  L1 w0.2: U1.20 18.744,14.4 18.744,12.956 19.173,12.527 19.173,8.227 19.967,7.433 20.817,7.433 B2.1
  L2 w0.2: U1.20 19.4,12.82 19.4,10.9 20.125,10.175 20.375,10.175 C6.2 19.5,8.6 19.5,5.375 C7.2
NetC5_2: C5.2 U1.21 | length 4.9
  L2 w0.2: U1.21 19.43,15.33 19.43,14.122 19.952,13.6 C5.2
NetC8_1: C8.1 R9.2 U1.9 Y1.2 | length 23.7
  L1 w0.2: v1(4.825,21.792) 3.05,21.792 Y1.2 3.05,15.75 5.206,13.594 5.206,11.277 6.133,10.35 R9.2 7.581,10.35 8.508,11.277 8.508,13.715 9.193,14.4 U1.9
  L2 w0.2: C8.1 3.45,20.7 4.466,21.716 4.749,21.716 v1(4.825,21.792)
NetC9_1: C9.1 R9.1 U1.10 Y1.1 | length 15.6
  L1 w0.2: v1(4.673,12.699) 3.05,12.699 Y1.1 3.05,9.65 4,8.7 6.675,8.7 R9.1 7.06,8.45 10.007,11.396 10.007,11.86 U1.10
  L2 w0.2: C9.1 3.6,12.8 4.464,12.8 4.565,12.699 v1(4.673,12.699)
NetD1_P: D1.P R6.1 | length 41.5
  L1 w0.2: R6.1 20.75,1.55 21.573,0.727 28.027,0.727 30.4,3.1 33.7,3.1 34.2,3.6 34.2,21.025 D1.P
NetJ1_1: J1.1 R1.2 | length 32.6
  L2 w0.2: R1.2 20.575,31.825 19.6,30.85 19.6,29 20.017,28.583 20.183,28.583 20.2,28.6 26.7,28.6 27.9,29.8 27.9,34 29.256,35.356 32.435,35.356 35.709,38.63 J1.1
NetJ1_3: J1.3 R2.2 | length 24.1
  L2 w0.2: R2.2 21.075,26.475 21.425,26.825 21.425,26.842 22.5,27.917 34.826,27.917 40.459,33.55 J1.3
NetJ1_5: J1.5 R3.2 | length 57.8
  L2 w0.2: R3.2 23.781,21.175 29.158,15.798 29.158,4.165 30.223,3.1 32.7,3.1 35.2,5.6 35.2,25.7 37.97,28.47 J1.5
NetJ5_3: J5.3 U1.28 | length 17.3
  L2 w0.2: J5.3 12.572,30.86 16.432,34.72 U1.28
NetJ5_4: J5.4 U1.27 | length 17.3
  L2 w0.2: J5.4 11.073,28.32 14.933,32.18 U1.27
NetJ6_2: J6.2 U1.23 | length 28.8
  L2 w0.2: U1.23 25.832,22.02 29.971,17.881 29.971,4.806 30.378,4.4 J6.2
NetR8_1: R8.1 U1.1 | length 15.7
  L1 w0.2: R8.1 7.694,20.8 8.573,21.679 8.573,33.256 9.387,34.07 10.037,34.72 U1.1
pads on no net: J2.2 J2.3 J3.10 J3.11 J3.MH1 J3.MH2 J3.MH3 J3.MH4 J3.MH5 U1.2 U1.3 U1.13 U1.14 U1.15 U1.17 U1.18 U1.19 U1.26

## Polygon pours and split planes (outlines as drawn)
+5V on L1 "+5V_L01_P022" (solid, remove dead copper, pour order 22): 0.3,48.7 43.7,48.7 43.7,0.3 0.3,0.3
GND on L1 "GND_L01_P020" (solid, remove dead copper, pour order 20): 26.5,38.9 26.8,38.6 28.6,38.6 28.6,35.3 27.5,34.2 27.5,33 39,21.5 39,9.1 35.2,5.3 35.2,3.4 34.2,2.4 30.6,2.4 28.7,0.5 8.4,0.5 8,0.9 8,5.6 5.8,7.8 2.1,7.8 1.6,8.3 1.6,26.912 0.8,27.712 0.8,34.4 1.5,35.1 2.8,35.1 4.3,36.6 4.3,40.7 6.4,40.7 9.8,44.1 16.8,44.1 16.8,46.8 14.9,48.7 0.3,48.7 0.3,0.3 43.7,0.3 43.7,48.7 35,48.7 26.5,40.2
GND on L1 "GND_L01_P017" (solid, remove dead copper, pour order 17): 24,12.1 27.1,12.1 29.2,10 29.2,3.3 27.3,1.4 24.3,1.4 24.3,3.1 25.9,3.1 26.6,3.8 26.6,5.1 25.9,5.8 24.7,5.8 24,6.5 24,7.3 24.8,8.1 26.3,8.1 26.3,10.6 24,10.6
GND on L2 "GND_L02_P026" (solid, remove dead copper, pour order 26): 43.7,0.3 43.7,48.7 0.3,48.7 0.3,0.3
+5V on L2 "+5V_L02_P023" (solid, remove dead copper, pour order 23): 6.5,23.4 0.3,23.4 0.3,34.2 0.9,34.8 3.3,34.8 7,38.5 28.4,38.5 29,37.9 29,35.6 22.3,28.9 21.7,28.9 21.7,31 22,31.3 22,33.5 19.6,35.9 9.1,35.9 5.2,32 1.3,32 0.9,31.6 0.9,27.4 1.3,27 6.5,27

## Other copper
L1:
  pour cut-out: 11,40.4 11,26 12.7,24.3 19.7,24.3 19.7,25.7 20,26 19.7,26.3 19.7,40.5 19.6,40.6
  pour cut-out: 34.608,5.8 36.6,5.8 38.7,7.9 38.7,21.367 28.9,31.167 28.9,26.9 34.487,21.313 34.488,21.313 34.488,5.919
  pour cut-out: 22.3,8 23.805,9.505 25,9.505 25,4.525 24.9,4.425 24.425,4.9 22.8,4.9
  pour cut-out: 26.8,1.1 36.5,1.1 36.6,1.2 36.6,5.8 26.8,5.8
  pour cut-out: 8.1,9.4 8.1,16.1 6.9,17.3 6.9,20.675 7.625,21.4 10.2,21.4 12.8,18.8 12.8,9.4
  pour cut-out: 1,30.1 3.3,30.1 3.3,29 1,29
L2:
  pour cut-out: 11.472,7.067 19.267,7.067 19.5,7.3 19.5,8.6 19.7,8.6 20.7,9.6 19.4,10.9 19.4,15.3 17.186,17.514 17.186,18.3 14.9,18.3 12.6,16 12.8,15.8 12.8,9.3 10.6,7.1
  pour cut-out: 2.3,19.95 4.992,19.95 5.392,19.55 5.392,22.669 6,23.277 6,23.3 0.506,23.3 0.3,23.094 0.3,19.9
  pour cut-out: 28.3,31.6 31.6,28.3 26.6,28.3
  pour cut-out: 3.6,28.3 2.8,27.5 2.8,27.3 6.6,27.3 6.806,27.094 6.806,24.9 8,24.9 8,22.6 8.7,21.9 8.6,21.8 8.6,20.604 9.162,20.042 9.22,20.1 14,20.1 14.8,20.9 21.3,20.9 21.3,26.5 16.8,31
  pour cut-out: 22.35,21.1 22.35,20.244 23.2,19.394 23.2,13.4 29.1,13.4 29.158,13.458 29.158,15.798 23.781,21.175
  pour cut-out: 22.6,27.7 22.6,26.515 18.842,22.756 18.842,21.458 19.2,21.1 25.5,21.1 25.5,20.1 29.8,15.8 29.6,15.6 29.6,4.3 31.2,4.3 32.1,3.4 32.4,3.7 33.3,3.7 35.2,5.6 35.2,25.7 38.4,28.9 38.4,31 37.909,31 34.826,27.917
  pour cut-out: 19.6,26.2 19.6,27.8 21.7,27.8 21.7,26.2
  pour cut-out: 33.1,8.1 33.1,5.8 30.3,5.8 30.3,8.1
  pour cut-out: 6,23.3 8,23.3 8,24.9 6,24.9
  pour cut-out: 19.7,30.8 22,30.8 22,29.1 19.7,29.1
  pour cut-out: 8.1,34.6 8.1,32.1 5.2,32.1 5.2,34.6
  pour cut-out: 28.8,38.7 28.8,36.5 26.5,36.5 26.5,38.7

## Silkscreen, mask and mechanical layers (free items; w line width, h text height)
Top Overlay:
  text "PWR / GND / TX / GND / RX / GND" at 37.05,25.925 h1
  text "MORSE CODE / ENCODER / DECODER" at 27.925,14.789 h2.1
  text "EN2160 / 200650U" at 31.875,10.325 h2.2
  text "OK / GND / NXT / GND / CNL / GND" at 26.8,2.05 h1
Bottom Overlay:
  text "MORSE CODE / ENCODER DECODER" at 35.375,33.525 h2.1 r90
  text "EN2160 200650U" at 38.825,30.875 h2.2 r90
Mechanical 1:
  lines w0.051: 0.025,0.025 0.025,48.975 43.975,48.975 43.975,0.025 0.025,0.025

## Text inside footprints (layer, text, board x,y; h text height)
J5: Top Overlay "GND" at 3.7,32.46 h1; Top Overlay "VCC" at 3.7,30.86 h1; Top Overlay "SCL" at 3.7,29.16 h1; Top Overlay "SDA" at 3.7,27.56 h1
J6: Top Overlay "GND" at 33.25,1.75 h1; Top Overlay "A0" at 33.25,3.4 h1; Top Overlay "VCC" at 33.25,4.9 h1